# EAGLE board source_eagle (EAGLE 9.6.2)
REV: E
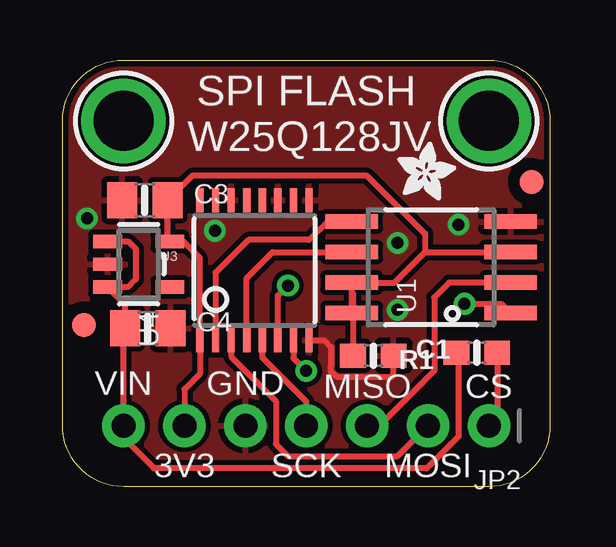
[diagram p0: board, top side]
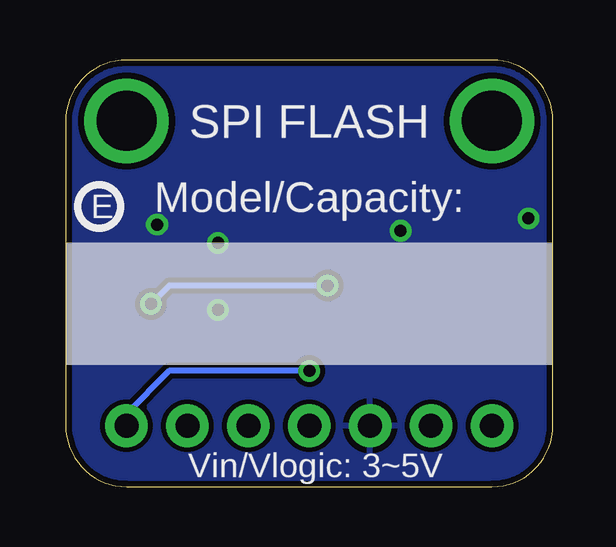
[diagram p1: board, bottom side, seen from below]

Size 20.32 x 17.78 mm. Coordinates in mm from the lower left corner, seen from the top.
Outline: 0,2.54 0,15.24 arc-90 2.54,17.78 17.78,17.78 arc-90 20.32,15.24 20.32,2.54 arc-90 17.78,0 2.54,0 arc-90 0,2.54
Copper layers (1*16): Top 0.035mm / dielectric 1.5mm / Bottom 0.035mm
Design rules "adafruit": minimum track width 8mil, minimum drill 15.5mil, track to track 8mil, track to pad 8mil, pad to pad 8mil, via to via 8mil, smd to smd 8mil, copper to edge 10mil, drill to drill 8mil, minimum pad ring 10mil, minimum via ring 8mil, stop-mask expansion 2mil, vias tented up to drill 20mil, thermal gap 10mil

## Footprints (pad centres in the part's own frame; a part is rotated, then mirrored left to right if it is on the bottom)
0603-NO = smd 1.075 x 1: 1 -0.85,0; 2 0.85,0
0805-NO = smd 1.24 x 1.5: 1 -0.95,0; 2 0.95,0
FIDUCIAL_1MM = smd 1 x 1: 1 0,0
1X07_ROUND_70 = drill 1 pad 1.778: 1 -7.62,0; 2 -5.08,0; 3 -2.54,0; 4 0,0; 5 2.54,0; 6 5.08,0; 7 7.62,0
SOIC8_208MIL = smd 0.6 x 2.2: 1 -1.905,-3.315; 2 -0.635,-3.315; 3 0.635,-3.315; 4 1.905,-3.315; 5 1.905,3.315; 6 0.635,3.315; 7 -0.635,3.315; 8 -1.905,3.315
TSSOP16 = smd 0.305 x 0.991: 1 -2.275,-2.918; 2 -1.625,-2.918; 3 -0.975,-2.918; 4 -0.325,-2.918; 5 0.325,-2.918; 6 0.975,-2.918; 7 1.625,-2.918; 8 2.275,-2.918; 9 2.275,2.918; 10 1.625,2.918; 11 0.975,2.918; 12 0.325,2.918; 13 -0.325,2.918; 14 -0.975,2.918; 15 -1.625,2.918; 16 -2.275,2.918
SOT23-5 = smd 0.55 x 1.2: 1 -0.95,-1.3; 2 0,-1.3; 3 0.95,-1.3; 4 0.95,1.3; 5 -0.95,1.3
MOUNTINGHOLE_2.5_PLATED = drill 2.5 pad 3.2: P$1 0,0

## Placement (x,y rotation side)
C1  0.1uF  [0603-NO]  12.95,5.46 0 top
C3  10uF  [0805-NO]  3.43,11.94 0 top
C4  10uF  [0805-NO]  3.56,6.6 0 top
FID2  FIDUCIAL_1MM  [FIDUCIAL_1MM]  0.89,6.73 0 top
FID3  FIDUCIAL_1MM  [FIDUCIAL_1MM]  19.56,12.7 0 top
JP2  [1X07_ROUND_70]  10.16,2.54 180 top
R1  10K  [0603-NO]  17.27,5.59 180 top
U1  Generic SPI Flash  [SOIC8_208MIL]  15.37,9.14 90 top
U3  74HC4050D  [TSSOP16]  8,9.02 0 top
U4  AP2127K-3.3  [SOT23-5]  3.17,9.27 270 top
U$13  [ADAFRUIT_2.5MM]  13.97,11.94 0 top
U$16  MOUNTINGHOLE2.5  [MOUNTINGHOLE_2.5_PLATED]  2.54,15.24 0 top
U$17  MOUNTINGHOLE2.5  [MOUNTINGHOLE_2.5_PLATED]  17.78,15.24 0 top
U$21  [PCBFEAT-REV-040]  18.92,11.68 0 bottom

## Library data of the parts
C1 C3 C4 R1 U1 U3 U$13 = microbuilder
FID2 FID3 = microbuilder; BOM: EXCLUDE
JP2 = adafruit_electromech
U4 = adafruit_power; JLC_ROTATION: 270
U$16 U$17 = adafruit_electromech; BOM: EXCLUDE
U$21 = microbuilder; REV: E

## Nets
3.3V: C1.1 C3.2 JP2.6 U1.3 U1.7 U1.8 U3.1 U4.5
GND: C1.2 C3.1 C4.2 JP2.5 U1.4 U3.8 U3.9 U3.11 U3.14 U4.2
MISO_3.3V: JP2.3 U1.2
MOSI: JP2.2 U3.3
MOSI_3.3V: U1.5 U3.2
SCK: JP2.4 U3.5
SCK_3.3V: U1.6 U3.4
SS: JP2.1 R1.1 U3.7
SSEL_3.3V: U1.1 U3.6
VIN: C4.1 JP2.7 R1.2 U4.1 U4.3

## Tracks (layer width: path | path; a pad name or v marks a point on that pad's centre or on a via)
3.3V
  Top 0.254: 12.05,8.13 U1.7 13.84,8.51 15.11,9.78 | 12.05,8.13 U1.8 | 12.05,8.13 12.1,8.08 C1.1 | JP2.6 5.08,4.06 5.73,4.71 U3.1 5.73,9.51 5.02,10.22 U4.5 4.38,10.32 C3.2 5.39,12.95 12.7,12.95 15.11,10.54 15.11,9.78 | 15.11,9.78 U1.3
GND  (via drill 0.5)
  Top 0.254: U3.8 10.92,6.1 11.2,5.82 11.2,5.01 11.18,4.99 11.18,4.83 11.43,4.57 13.72,4.57 13.8,4.66 C1.2
  other vias: 1.02,11.18 13.97,10.16 13.97,7.37 16.51,10.92 6.35,10.67
  pour Top: 0,17.78 20.32,17.78 20.32,0 0,0
  pour Bottom: 0,17.78 20.32,17.78 20.32,0 0,0
MISO_3.3V
  Top 0.254: U1.2 16.13,8.51 15.49,7.87 15.49,4.83 13.21,2.54 JP2.3
MOSI
  Top 0.254: U3.3 7.03,5.42 8.89,3.56 8.89,1.78 9.4,1.27 13.97,1.27 JP2.2
MOSI_3.3V
  Top 0.254: U1.5 11.04,11.05 10.27,10.29 7.75,10.29 6.38,8.92 U3.2
SCK
  Top 0.254: U3.5 8.33,5.39 10.16,3.56 JP2.4
SCK_3.3V
  Top 0.254: U3.4 7.68,8.69 8.76,9.78 U1.6
SS  (via drill 0.5)
  Top 0.254: R1.1 18.12,2.88 JP2.1 | U3.7 9.63,5.36 v10.16,4.83
  Bottom 0.254: v10.16,4.83 16,4.83 17.78,3.05 JP2.1
SSEL_3.3V  (via drill 0.5)
  Top 0.254: U3.6 8.98,7.96 v9.4,8.38 | v16.76,7.62 18.3,7.62 U1.1
  Bottom 0.254: v9.4,8.38 16,8.38 v16.76,7.62
VIN
  Top 0.254: U4.1 2.73,10.22 3.05,9.91 3.05,8.64 2.73,8.32 U4.3 2.61,7.59 C4.1 2.54,6.54 JP2.7 2.54,2.03 3.81,0.76 15.19,0.76 16.51,2.09 16.51,5.5 R1.2

## Text on the board
tPlace: SPI FLASH | W25Q128JV | VIN | GND | MISO | CS | 3V3 | SCK | MOSI
bPlace: SPI FLASH | Model/Capacity: | Vin/Vlogic: 3~5V